# Altium PCB OSSI-1 Front Panel.PcbDoc
Units mil, origin at the board's own origin, x right, y up, seen from the top; angles counter-clockwise.
Board outline 4312 x 3249 mil, 2 copper layers (Top, Bottom), stack 61.811 mil thick; 19 components, 11 nets, 56 pads, 4 vias.
Unrouted connection lines stored in the file: 2.
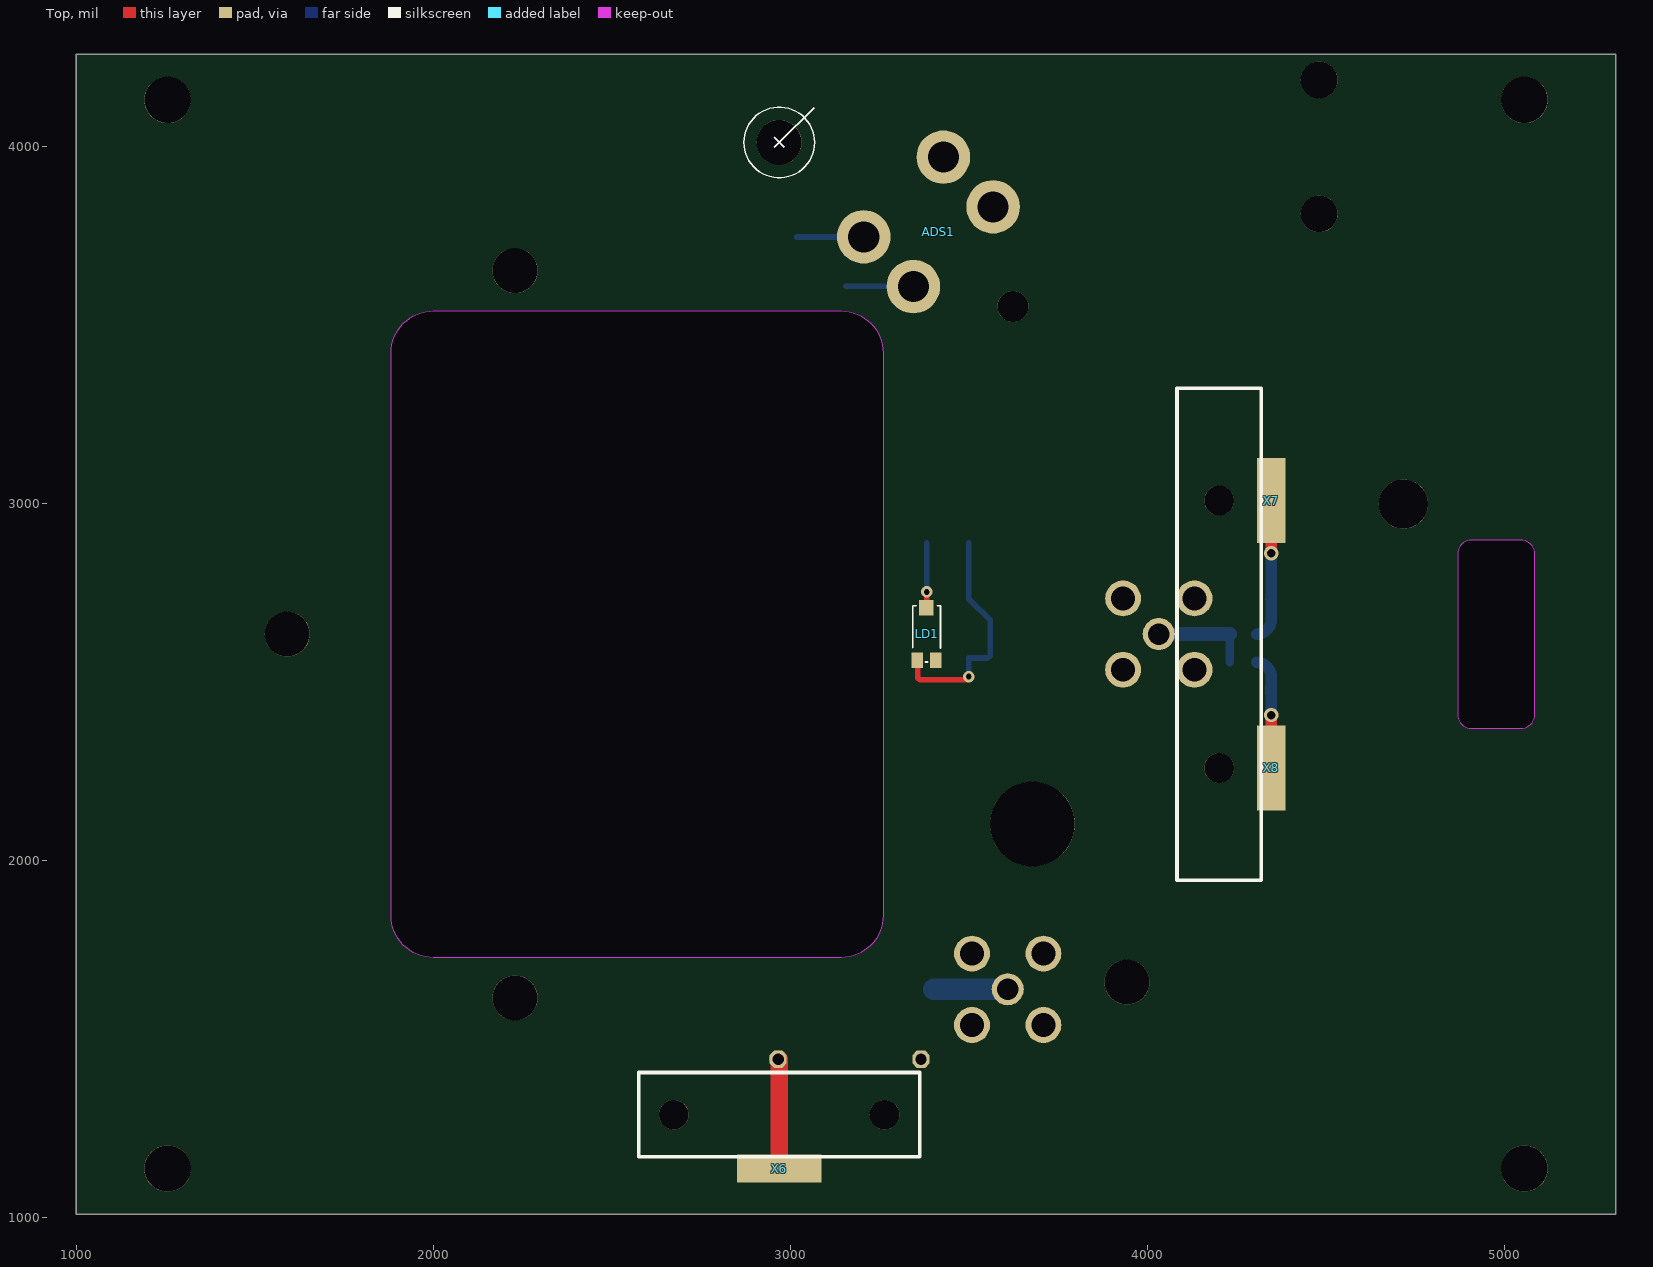
[diagram p0: Top view]
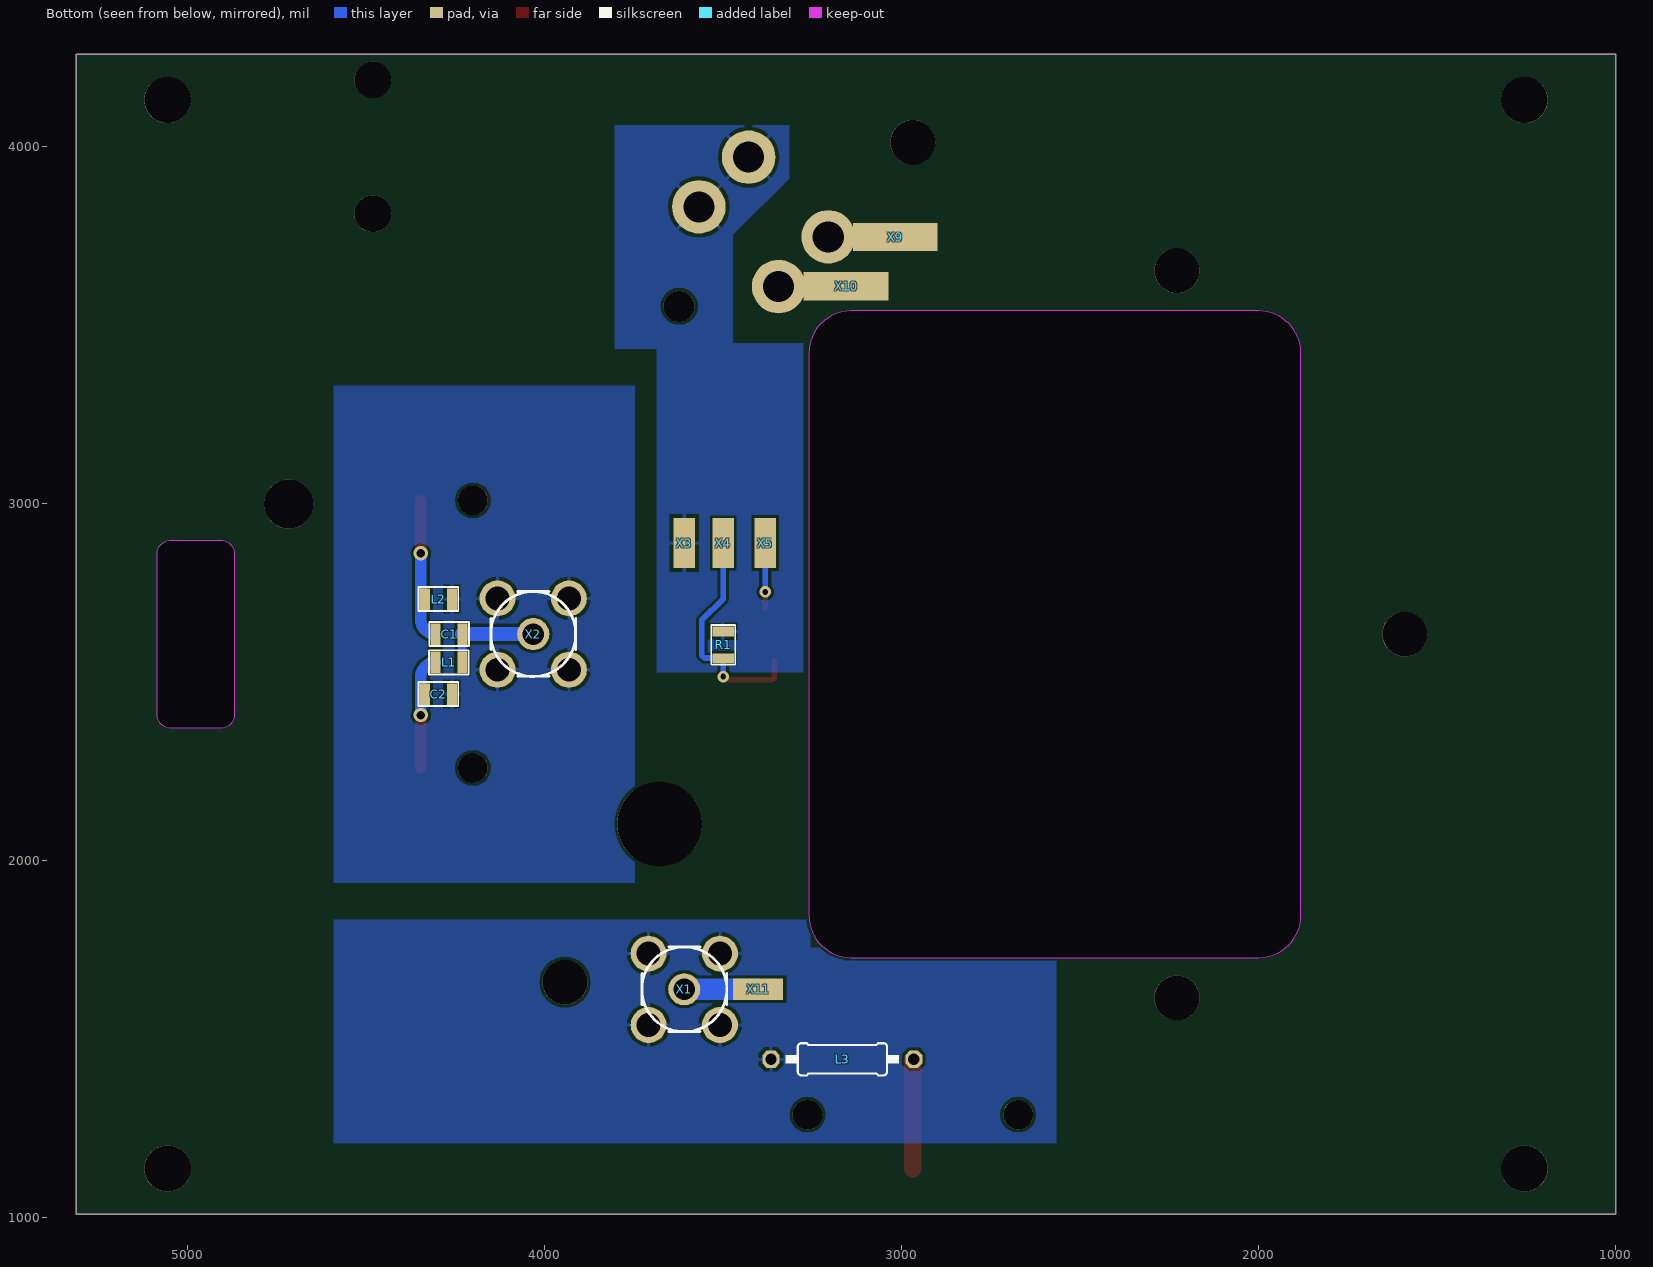
[diagram p1: Bottom view, seen from below]

## Layer stack, top to bottom
Top Solder: solder mask 0.4, Solder Resist, Dk 3.5
Top: signal copper 1.378
Dielectric 1: core 59.0551, FR-4, Dk 4.8
Bottom: signal copper 1.378
Bottom Solder: solder mask 0.4, Solder Resist, Dk 3.5

## Board outline
1000,1009.84 5312,1009.84 5312,4258.84 1000,4258.84
cut-out: 4908,2370.84 5046,2370.84 ccw(c5046,2409.84) 5085,2409.84 5085,2858.84 ccw(c5046,2858.84) 5046,2897.84 4908,2897.84 ccw(c4908,2858.84) 4869,2858.84 4869,2409.84 ccw(c4908,2409.84)
cut-out: 2000,3539.84 3142,3539.84 cw(c3142,3421.84) 3260,3421.84 3260,1846.84 cw(c3142,1846.84) 3142,1728.84 2000,1728.84 cw(c2000,1846.84) 1882,1846.84 1882,3421.84 cw(c2000,3421.84)

## Design rules (kind name [scope] priority, off if disabled: settings)
Clearance mdViaVia [IsVia vs IsVia] p1: gap=8
Clearance mdPadVia [IsPad vs IsVia] p2: gap=8
Clearance mdPadPad [IsPad vs IsPad] p3: gap=8
Clearance mdWireVia [(InLayerClass('Signal Layers') AND IsTrack) vs IsVia] p4: gap=8
Clearance mdWirePad [(InLayerClass('Signal Layers') AND IsTrack) vs IsPad] p5: gap=8
Clearance mdWireWire [(InLayerClass('Signal Layers') AND IsTrack) vs (InLayerClass('Signal Layers') AND IsTrack)] p6: gap=8
Clearance [All] p7: gap=8
HoleSize [All] p1: absolutevalues=TRUE maxlimit=100000 minlimit=24 maxpercent=80.000 minpercent=20.000
HoleToHoleClearance [All] p1: gap=8 allowstackedmicrovias=TRUE
PolygonConnect ThermalVias [IsVia] p1: connectstyle=Direct reliefconductorwidth=10 reliefentries=4 polygonreliefangle="90 Angle" airgapwidth=10
PolygonConnect [All] p2: connectstyle=Relief reliefconductorwidth=10 reliefentries=4 polygonreliefangle="90 Angle" airgapwidth=10
RoutingVias [All] p1: holewidth=28 width=50 viastyle="Through Hole" minholewidth=28 minwidth=50 maxholewidth=28 maxwidth=50
SilkToSilkClearance [All] p1 off: silktosilkclearance=10
SilkToSolderMaskClearance [IsPad] p1 off: minsilkscreentomaskgap=10 clearancetoexposedcopper=TRUE
SolderMaskExpansion [All] p1: expansion=4
Width [All] p1: maxlimit=100000 minlimit=10 preferedwidth=10
26 further rules are at their usual default settings.

## Components (designator, comment, footprint, x,y, rotation, side; value= is the part's Value field where it differs from the comment)
ADS1 "OSSIADS" OSSIADS 2969,4011.84 r45 top
C1 "5.975pF" C0805(2012) 4268,2634.84 r180 bottom
C2 "5.975pF" C0805(2012) 4298,2466.84 r180 bottom
L1 "22.4nH" L0805(2012) 4268,2555.84 r0 bottom
L2 "22.4nH" L0805(2012) 4298,2732.84 r180 bottom
L3 "6mm dia, 5 turn" 0207/10 3166,1443.84 r0 bottom
LD1 "TEMT6000X01" TEMT6000-SEN 3382,2634.84 r90 top
R1 "10k" R0805(2012) 3500,2604.84 r270 bottom
X1 "RFCON-MCX-V" MCX-V 3609,1639.84 r180 bottom
X2 "RFCON-MCX-V" MCX-V 4032,2634.84 r180 bottom
X3 "P-PAD-S" P-PAD-S 3609,2889.84 r270 bottom
X4 "P-PAD-S" P-PAD-S 3500,2889.84 r270 bottom
X5 "P-PAD-S" P-PAD-S 3382,2889.84 r270 bottom
X6 "P-PAD" P-PAD 2969,1137.84 r0 top
X7 "P-PAD" P-PAD 4347,3008.84 r270 top
X8 "P-PAD" P-PAD 4347,2259.84 r90 top
X9 "P-PAD" P-PAD 3018,3746.84 r180 bottom
X10 "P-PAD" P-PAD 3156,3608.84 r180 bottom
X11 "P-PAD-S" P-PAD-S 3402,1639.84 r180 bottom

## Footprints (in the part's own frame and the unit in brackets; to place one, negate y for a bottom-side part, rotate by r counter-clockwise, add the part's x,y. Pads: shape width x height; smd on the part's side, far side on the other; paste and mask are expansions set on the pad)
0207/10 [mil] "0207/10"
  oct 48x48 hole 32: 1(-200,0) 2(200,0)
  silkscreen extent -159,-45 159,45
C0805(2012) [mil] "C0805(2012)"
  rect 28x60 smd: 1(-37.4,0) 2(38,0)
  silkscreen extent -55,-33 56,34
L0805(2012) [mil] "L0805(2012)"
  rect 28x60 smd: 1(-37.4,0) 2(38,0)
  silkscreen extent -55,-33 56,34
MCX-V [mil] "MCX-V"
  round 90 hole 60: 1(0,0)
  round 100.5 hole 67: 2(-100,100) 3(100,100) 4(100,-100) 5(-100,-100)
  silkscreen extent -119,-119 119,119
OSSIADS [mil] "OSSIADS"
  round 87 hole 87: 1(138,-787.4)
  round 150 hole 87: 1A(-19.69,-354.33) 1B(296,-354.33) 2A(-19.69,-551.18) 2B(296,-551.18)
  silkscreen extent -99,-99 138,99
P-PAD [mil] "P-PAD"
  rect 237x79 smd: 1(0,0)
P-PAD-S [mil] "P-PAD-S"
  rect 140x60 smd: 1(0,0)
R0805(2012) [mil] "R0805(2012)"
  rect 28x60 smd: 1(-37.4,0) 2(38,0)
  silkscreen extent -55,-33 56,34
TEMT6000-SEN [mil] "TEMT6000-SEN"
  rect 44x32 smd: BASE(-73.62,-25.59) EMITTER(-73.62,26)
  rect 44x40 smd: COLLECTOR(74,1)
  silkscreen extent -78,-39 79,39

## Part data
C1 C2: library part C0805(2012)
L1 L2: library part L0805(2012)
L3: library part 0207/10
LD1: library part TEMT6000-SEN
R1: library part R0805(2012)
X1 X2: library part MCX-V

## Free pads (board coordinates)
  round 130 hole 130: 1(1256,1137.84) 1(1256,4130.84) 1(5056,1137.84) 1(5056,4130.84)
  round 126 hole 126: 1(1591,2634.84) 1(2229,1615.84) 1(2229,3652.84) 1(2969,4011.84) 1(3943,1659.84)
  round 83 hole 83: 1(2674,1288.84) 1(3264,1288.84) 1(4201,2259.84) 1(4201,3008.84)
  round 237 hole 237: 1(3678,2102.84)
  round 103 hole 103: 1(4481,3811.84) 1(4481,4186.84)
  round 138 hole 138: 1(4717,2998.84)

## Via types
v1: diameter 40/40 (per signal layer), hole 24, Top to Bottom, 2 vias
v2: diameter 32/32 (per signal layer), hole 16, Top to Bottom, 2 vias

## Nets (pads, with @x,y where several pads share a name; then routed paths per layer and width w, separated by ;. In a path a pad name is that pad's centre, name@x,y a point inside that pad or via, vN(x,y) a via of type N, cw(c..) or ccw(c..) an arc to the next point about the centre after c; other vN are vias at no path point)
3.3VOBC: LD1.COLLECTOR X5.1 | length 182
  Top w16: LD1.COLLECTOR@3382,2707.84 v2(3382,2752.84)
  Bottom w16: v2(3382,2752.84) X5.1
ADS_1A: ADS1.1A X9.1 | length 189
  Bottom w16: X9.1 3206,3746.84 ADS1.1A@3206,3747.84
ADS_2A: ADS1.2A X10.1 | length 199
  Bottom w16: X10.1 ADS1.2A@3323,3608.84 ; ADS1.2A@3323,3598.84 ADS1.2A@3323,3608.84 ; ADS1.2A@3345,3608.84 ADS1.2A@3323,3608.84
COMMS_N: C2.1 L1.2 X8.1 | length 272
  Top w32: X8.1 v1(4347,2407.84)
  Bottom w10: C2.1@4335,2466.84 C2.1@4335,2484.84
  Bottom w32: v1(4347,2407.84) 4347,2496.84 4347,2513.84
COMMS_P: C1.1 L2.1 X7.1 | length 378
  Top w32: v1(4347,2860.84) X7.1
  Bottom w10: 4347,2675.84 L2.1@4347,2720.84
  Bottom w32: 4347,2675.84 v1(4347,2860.84)
GND: ADS1.1B ADS1.2B C2.2 L2.2 L3.2 R1.1 X1.2 X1.3 X1.4 X1.5 X2.2 X2.3 X2.4 X2.5 X3.1
LED_SUNSENSOR: LD1.EMITTER R1.2 X4.1 | length 652.3
  Top w16: LD1.EMITTER@3357,2560.84 3357,2511.84 3363,2506.84 3491,2506.84 v2(3500,2515.84)
  Bottom w16: v2(3500,2515.84) 3500,2567.84 3552,2567.84 3560,2574.84 3560,2673.84 3500,2732.84 X4.1
N$1: L3.1 X6.1 | length 309
  Top w50: L3.1 2969,1443.84 X6.1
N$2: X1.1 X11.1 | length 207
  Bottom w60: X11.1 X1.1
N$3: 
N$45: C1.2 L1.1 X2.1 | length 278
  Bottom w24: L1.1@4231,2555.84 C1.2@4231,2634.84
  Bottom w40: X2.1 C1.2@4231,2634.84
pads on no net: ADS1.1 LD1.BASE
copper on no net: | length 167.3
  Bottom w10: 4335,2484.84 cw(c4347,2484.84) 4347,2496.84 ; 4335,2732.84 cw(c4335,2720.84) 4347,2720.84
  Bottom w32: 4306,2555.84 cw(c4305.5,2514.34) 4347,2513.84 ; 4306,2634.84 ccw(c4306,2675.84) 4347,2675.84

## Polygon pours and split planes (outlines as drawn)
GND on Bottom "Bottom-GND" (solid, remove dead copper, pour order 2): 2567,1756.84 2567,1354.84 2567,1208.84 4591,1208.84 4591,1354.84 4591,1834.84 3256,1834.84 3256,1756.84
GND on Bottom "Bottom-GND 1" (solid, remove dead copper, pour order 4): 3315,4059.84 3804,4059.84 3804,3874.84 3804,3433.84 3686,3433.84 3686,2527.84 3276,2527.84 3276,3449.84 3473,3449.84 3473,3753.51 3315,3910.51
GND on Bottom "Bottom-GND 2" (solid, remove dead copper, pour order 6): 3748,3330.84 3748,1937.84 4591,1937.84 4591,3330.84

## Keep-outs
Keep-Out Layer:
  the board outline again, w0

## Other copper
Bottom:
  pour cut-out net N$3: 1000,1009.84 1010,1009.84 1010,1019.84 1000,1019.84

## Silkscreen, mask and mechanical layers (free items; w line width, h text height)
Top Overlay:
  lines w10: 2575,1170.84 2575,1406.84 3363,1406.84 3363,1170.84 2575,1170.84 ; 4083,1945.84 4083,3322.84 4319,3322.84 4319,1945.84 4083,1945.84
Dimension:
  lines w0: 1000,1009.84 5312,1009.84 5312,4258.84 1000,4258.84 1000,1009.84 ; 1882,1846.84 ccw(c2000,1846.84) 2000,1728.84 3142,1728.84 ccw(c3142,1846.84) 3260,1846.84 3260,3421.84 ccw(c3142,3421.84) 3142,3539.84 2000,3539.84 ccw(c2000,3421.84) 1882,3421.84 1882,1846.84 ; 4869,2409.84 ccw(c4908,2409.84) 4908,2370.84 5046,2370.84 ccw(c5046,2409.84) 5085,2409.84 5085,2858.84 ccw(c5046,2858.84) 5046,2897.84 4908,2897.84 ccw(c4908,2858.84) 4869,2858.84 4869,2409.84
tDocu:
  lines w10: 1288,1000 1288,4267.84 ; 1351,1000 1351,4267.84 ; 1792,1000 1792,4267.84 ; 1855,1000 1855,4267.84 ; 2296,1000 2296,4267.84 ; 2359,1000 2359,4267.84 ; 2800,1000 2800,4267.84 ; 2863,1000 2863,4267.84 ; 3304,1000 3304,4267.84 ; 3367,1000 3367,4267.84 ; 3808,1000 3808,4267.84 ; 3871,1000 3871,4267.84 ; 4312,1000 4312,4267.84 ; 4375,1000 4375,4267.84 ; 4815,1000 4815,4267.84 ; 4878,1000 4878,4267.84
Unrouted:
  lines w0: 3609,2889.84 3932,2734.84 ; 3709,1739.84 3932,2534.84

## Text inside footprints (layer, text, board x,y; h text height)
ADS1: tNames ">NAME" at 3605.4,3304.74 h108.5 r45; tValues ">VALUE" at 3676.11,3234.03 h108.5 r45
C1: bNames ">NAME" at 4303,2674.84 h77.5; bValues ">VALUE" at 4303,2544.84 h77.5
C2: bNames ">NAME" at 4333,2506.84 h77.5; bValues ">VALUE" at 4333,2376.84 h77.5
L1: bNames ">NAME" at 4233,2515.84 h77.5 r180; bValues ">VALUE" at 4233,2645.84 h77.5 r180
L2: bNames ">NAME" at 4333,2772.84 h77.5; bValues ">VALUE" at 4333,2642.84 h77.5
L3: bNames ">NAME" at 3046,1383.84 h77.5 r180; bValues ">VALUE" at 3077,1468.84 h77.5 r180
LD1: tNames ">Name" at 3367,2594.84 h24.8 r90; tValues ">Value" at 3412,2594.84 h24.8 r90
R1: bNames ">NAME" at 3460,2639.84 h77.5 r90; bValues ">VALUE" at 3590,2639.84 h77.5 r90
X1: bNames ">NAME" at 3709,1814.84 h77.5; bValues ">VALUE" at 3734,1414.84 h77.5
X2: bNames ">NAME" at 4132,2809.84 h77.5; bValues ">VALUE" at 4157,2409.84 h77.5
X3: bNames ">NAME" at 3559,2989.84 h77.5 r90; bValues ">VALUE" at 3709,2989.84 h77.5 r90
X4: bNames ">NAME" at 3450,2989.84 h77.5 r90; bValues ">VALUE" at 3600,2989.84 h77.5 r90
X5: bNames ">NAME" at 3332,2989.84 h77.5 r90; bValues ">VALUE" at 3482,2989.84 h77.5 r90
X6: tNames ">NAME" at 2819,1187.84 h77.5; tValues ">VALUE" at 2819,1037.84 h77.5
X7: tNames ">NAME" at 4397,3158.84 h77.5 r270; tValues ">VALUE" at 4247,3158.84 h77.5 r270
X8: tNames ">NAME" at 4297,2109.84 h77.5 r90; tValues ">VALUE" at 4447,2109.84 h77.5 r90
X9: bNames ">NAME" at 3168,3796.84 h77.5; bValues ">VALUE" at 3168,3646.84 h77.5
X10: bNames ">NAME" at 3306,3658.84 h77.5; bValues ">VALUE" at 3306,3508.84 h77.5
X11: bNames ">NAME" at 3502,1689.84 h77.5; bValues ">VALUE" at 3502,1539.84 h77.5